# Altium PCB 多合一红外工具(1).PcbDoc
Units mm, origin at the board's own origin, x right, y up, seen from the top; angles counter-clockwise.
Board outline 166.97 x 106.58 mm, 2 copper layers (Top Layer, Bottom Layer); 62 components, 55 nets, 219 pads, 54 vias.
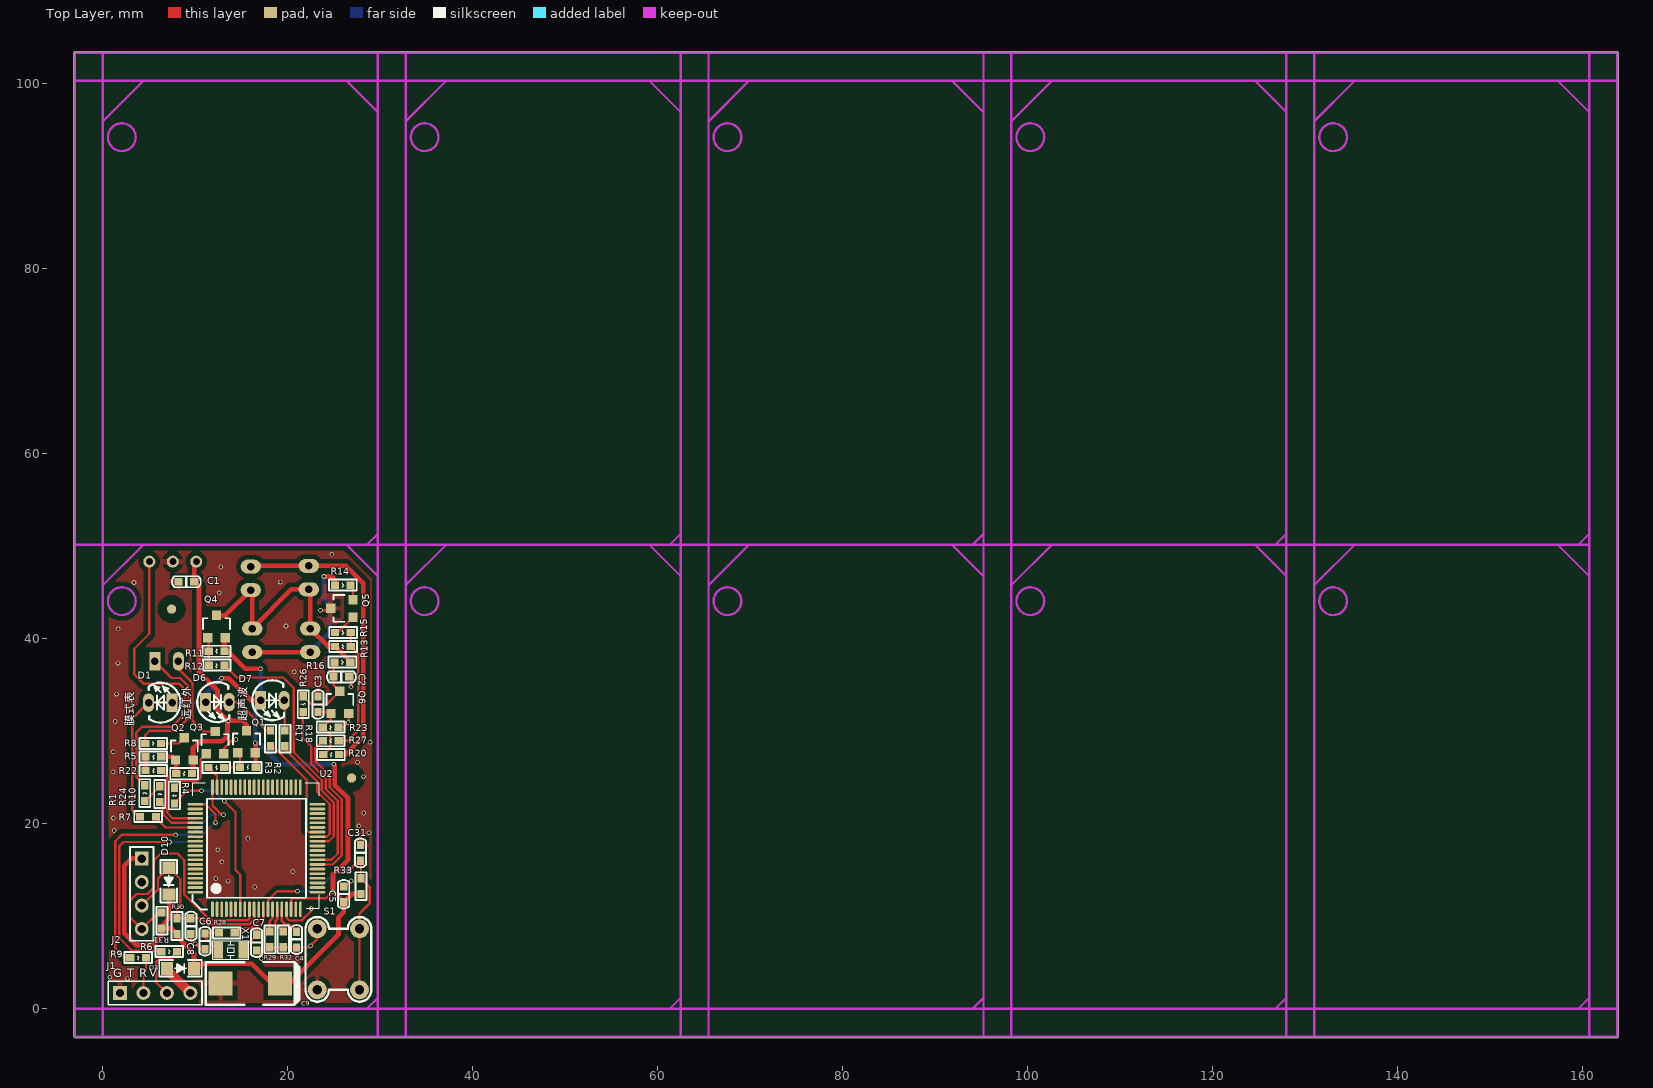
[diagram p0: Top Layer view]
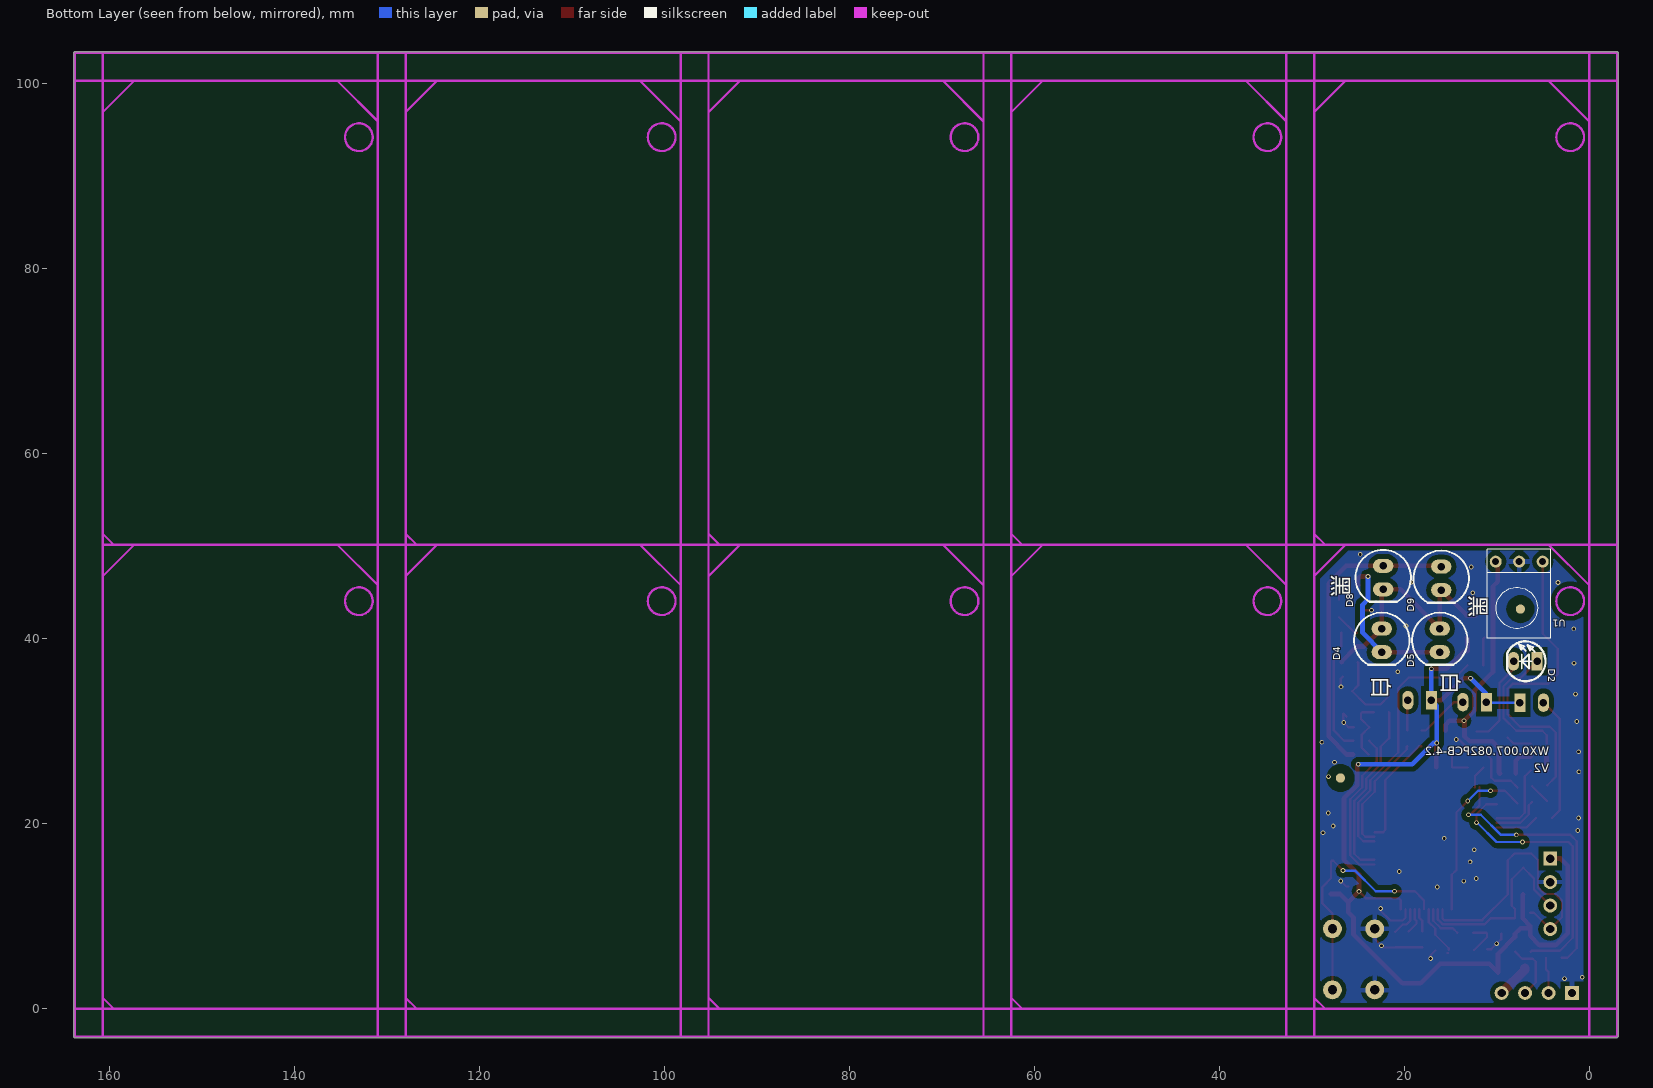
[diagram p1: Bottom Layer view, seen from below]

## Layer stack, top to bottom
Top Solder: solder mask 0.0102, Solder Resist, Dk 3.5
Top Layer: signal copper 0.0356
Dielectric 1: dielectric 0.32, FR-4, Dk 4.8
Bottom Layer: signal copper 0.0356
Bottom Solder: solder mask 0.0102, Solder Resist, Dk 3.5

## Board outline
-3.127,-2.972 ccw(c-3,-2.972) -3.09,-3.062 -3.062,-3.09 ccw(c-2.972,-3) -2.972,-3.127 163.717,-3.127 ccw(c163.717,-3) 163.844,-3 163.844,103.33 ccw(c163.717,103.33) 163.717,103.457 -2.997,103.457 ccw(c-2.997,103.33) -2.999,103.457 ccw(c-3,103.33) -3.127,103.33 -3.127,100.33 cw(c-3,100.33) -3.127,100.332 -3.127,100.33

## Design rules (kind name [scope] priority, off if disabled: settings)
Clearance VIA-VIA [ISVIA vs ISVIA] p1: gap=0.508 ignorepadtopadclearanceinfootprint=FALSE except(0: Arc-Hole Track-Hole SMDPad-Hole THPad-Hole Via-Hole Fill-Hole Poly-Hole Region-Hole Text-Hole)
Clearance VIA-PAD [ISVIA vs ISPAD] p2: gap=0.381 ignorepadtopadclearanceinfootprint=FALSE except(0: Arc-Hole Track-Hole SMDPad-Hole THPad-Hole Via-Hole Fill-Hole Poly-Hole Region-Hole Text-Hole)
Clearance VIA-TRACK [ISVIA vs ISTRACK] p3: gap=0.381 ignorepadtopadclearanceinfootprint=FALSE except(0: Arc-Hole Track-Hole SMDPad-Hole THPad-Hole Via-Hole Fill-Hole Poly-Hole Region-Hole Text-Hole)
Clearance Polygon [InPolygon] p4: gap=0.508 ignorepadtopadclearanceinfootprint=FALSE except(0: Arc-Hole Track-Hole SMDPad-Hole THPad-Hole Via-Hole Fill-Hole Poly-Hole Region-Hole Text-Hole)
Clearance [All] p5: gap=0.178 ignorepadtopadclearanceinfootprint=FALSE except(0: Arc-Hole Track-Hole SMDPad-Hole THPad-Hole Via-Hole Fill-Hole Poly-Hole Region-Hole Text-Hole)
ComponentClearance [All] p1 off: gap=0.254 collisioncheckmode=3 verticalgap=0.254 showdistances=FALSE
FabricationTestPointUsage TestPointUsage [All] p1: valid=0 allowmultiple=FALSE
FabricationTestpoint Testpoint [(IsPad And (OnTopLayer Or OnBottomLayer))] p1: side=3 testpointundercomponent=TRUE minsize=1.016 maxsize=2.54 preferedsize=1.524 minholesize=0 maxholesize=1.016 preferedholesize=0.813 testpointgrid=0.025 allowsidetop=TRUE allowsidebottom=TRUE usegrid=TRUE gridtolerance=0
HoleSize [All] p1 off: absolutevalues=TRUE maxlimit=7.62 minlimit=0 maxpercent=80.000 minpercent=20.000
HoleToHoleClearance [All] p1 off: gap=0.254 allowstackedmicrovias=TRUE
LayerPairs [All] p1 off: enforce=TRUE
MinimumSolderMaskSliver [All] p1 off: minsoldermaskwidth=0.254
NetAntennae [All] p1 off: netantennaetolerance=0
PlaneConnect [All] p1: planeconnectstyle=Relief reliefexpansion=0.508 reliefentries=4 reliefconductorwidth=0.508 reliefairgap=0.254
PolygonConnect [isvia] p1: connectstyle=Direct reliefconductorwidth=0.381 reliefentries=4 polygonreliefangle="90 Angle" airgapwidth=0.254
PolygonConnect PolygonConnect_1 [All] p2: connectstyle=Relief reliefconductorwidth=0.508 reliefentries=4 polygonreliefangle="90 Angle" airgapwidth=0.508
RoutingVias [All] p1: holewidth=0.254 width=0.508 viastyle="Through Hole" minholewidth=0.127 minwidth=0.127 maxholewidth=1.27 maxwidth=2.54
SilkToBoardRegionClearance [All] p1 off:
SilkToSilkClearance [All] p1 off: silktosilkclearance=0.254
SilkToSolderMaskClearance [IsPad] p1 off: minsilkscreentomaskgap=0.254 clearancetoexposedcopper=TRUE
SolderMaskExpansion [All] p1: expansion=0.102
Width [All] p1: maxlimit=7.62 minlimit=0.203 preferedwidth=0.203
18 further rules are at their usual default settings.

## Components (designator, comment, footprint, x,y, rotation, side; value= is the part's Value field where it differs from the comment)
C1 "100nF/50V" CAP0603 8.204,46.177 r0 top
C2 "10pF/50V" CAP0603 24.968,35.89 r0 top
C3 "10pF/50V" CAP0603 23.266,32.08 r90 top
C4 "100nF/50V" CAP0603 20.955,8.306 r270 top
C5 "100nF/50V" CAP0603 26.06,13.208 r270 top
C6 "12pF/50V" CAP0603 11.049,8.128 r270 top
C7 "12pF/50V" CAP0603 16.637,7.976 r270 top
C8 "0.1uF" C0603 9.525,8.103 r90 top
C9 "220uF/10V" CAT7343 19.152,2.743 r180 top
C31 "0.1uF" C0603 27.864,17.678 r270 top
D1 "LED" LED2_300 7.493,33.096 r270 top
D2 "AT203" IR_254_532_300 5.639,37.567 r270 bottom
D3 "DSK14" SOD-123FL 6.883,4.369 r0 top
D4 "AT205B" IR_254_1000_500 22.428,39.827 r90 bottom
D5 "AT205B" IR_254_1000_500 16.154,39.827 r90 bottom
D6 "LED" LED2_300 11.125,33.147 r90 top
D7 "LED" LED2_300 17.069,33.35 r90 top
D8 "AT405-PD-01" IR_254_1000_500 22.276,46.609 r90 bottom
D9 "AT405-PD-01" IR_254_1000_500 16.002,46.533 r90 bottom
D10 "LL4148" SOD-123FL 7.137,15.316 r270 top
J1 "Input" HDR1X4 1.854,1.702 r0 top
J2 "HDR254M1X4" HDR1X4 4.216,16.231 r270 top
Q1 "PNPS-9012" SOT-23 15.537,28.854 r0 top
Q2 "PNPS-9012" SOT-23 8.814,28.092 r0 top
Q3 "NPNS-9013" SOT-23 12.141,28.778 r0 top
Q4 "PNPS-9012" SOT-23 12.294,41.326 r0 top
Q5 "PNPS-9012" SOT-23 25.857,43.282 r90 top
Q6 "NPNS-9013" SOT-23 25.629,33.122 r0 top
R1 "51R 5%" RES0603 4.547,24.155 r270 top
R2 "10K 5%" RES0603 14.834,26.111 r0 top
R3 "1K 5%" RES0603 11.43,26.086 r0 top
R4 "10K 5%" RES0603 7.95,25.425 r0 top
R5 "1K 5%" RES0603 4.623,27.229 r0 top
R6 "1K 5%" RES0603 8.026,6.172 r180 top
R7 "1K" R0603 5.74,20.752 r180 top
R8 "220R 5%" RES0603 6.299,28.677 r180 top
R9 "1K 5%" RES0603 4.674,5.512 r180 top
R10 "1K 5%" RES0603 7.747,23.901 r270 top
R11 "10K 5%" RES0603 11.455,38.659 r0 top
R12 "1K 5%" RES0603 13.157,37.135 r180 top
R13 "20K 5%" RES0603 26.822,39.167 r180 top
R14 "100R 5%" RES0603 26.797,45.796 r180 top
R15 "3K 5%" RES0603 26.822,40.665 r180 top
R16 "20K 5%" RES0603 26.746,37.465 r180 top
R17 "1K" R0603 18.136,28.372 r90 top
R18 "1K" R0603 19.685,28.372 r90 top
R20 "20K 5%" RES0603 23.825,27.483 r0 top
R22 "0R 5%" RES0603 4.623,25.756 r0 top
R23 "47K 5%" RES0603 25.476,30.429 r180 top
R24 "0R 5%" RES0603 6.172,24.054 r270 top
R26 "0R 5%" RES0603 21.666,32.08 r90 top
R27 "0R 5%" RES0603 23.8,28.981 r0 top
R28 "100k" R0603 12.573,8.204 r0 top
R29 "100k" R0603 18.059,6.655 r90 top
R30 "10k" R0603 8.026,9.779 r270 top
R31 "1K" R0603 6.375,8.687 r90 top
R32 "100k" R0603 19.507,6.655 r90 top
R33 "200k" R0603 27.915,14.097 r270 top
S1 "KEY" KEY-6*6 25.476,5.334 r90 top
U1 "HMR538" HM538R1 5.029,48.336 r0 bottom locked
U2 "R7F0C004M2DFB" LQFP80 16.612,17.348 r90 top
X1 "32.768K" XTAL-2S 15.189,6.35 r180 top

## Footprints (in the part's own frame and the unit in brackets; to place one, negate y for a bottom-side part, rotate by r counter-clockwise, add the part's x,y. Pads: shape width x height; smd on the part's side, far side on the other; paste and mask are expansions set on the pad)
C0603 [mil]
  rect 35x31 smd: 1(-0.49,0) 2(66.51,0)
  silkscreen extent -29,-24 94,23, body extent 1,-15 72,15, height 20
CAP0603 [mil]
  rect 35x31 smd: 1(-0.49,0) 2(66.51,0)
  silkscreen extent -29,-24 94,23, body extent 1,-15 72,15, height 20
CAT7343 [mm]
  rect 2.6x2.6 smd: 1(0,0) 2(6.4,0)
  silkscreen extent -2.08,-2.3 8.03,2.33, body extent -0.6,-2.29 7,2.31, height 3.1
HDR1X4 [mm] "Connector; Header; 4 Position"
  rect 1.5x1.5 hole 0.9: 1(0,0)
  round 1.5 hole 0.9: 2(2.54,0) 3(5.08,0) 4(7.62,0)
  silkscreen extent -1.27,-1.27 8.89,1.27
HM538R1 [mm]
  round 1.3 hole 0.75: 1(0,0) 2(2.54,0) 3(5.08,0)
  silkscreen extent -0.89,-1.35 5.97,8.31
IR_254_532_300 [mm]
  rect 2x1.2 hole 0.813: 1(0,0)
  oval 2x1.2 hole 0.813: 2(0,-2.54)
  silkscreen extent -2.16,-3.23 2.16,0.91, body extent -1.65,-2.91 1.64,0.39, height 5.51
IR_254_1000_500 [mil]
  oval 60x86.61 hole 32: 1(50,0) 2(-50,0)
  silkscreen extent -103,-118 118,118
KEY-6*6 [mil]
  round 80 hole 40: 1(-130,-90) 1(130,-90) 2(-130,90) 2(130,90)
  silkscreen extent -180,-140 180,140
LED2_300 [mm]
  rect 2x1.2 hole 0.813: 1(0,0)
  oval 2x1.2 hole 0.813: 2(0,-2.54)
  silkscreen extent -2.16,-2.53 2.16,0.91, body extent -1.65,-2.91 1.64,0.39, height 5.51
LQFP80 [mm]
  oval 1.7x0.3 smd: 1(-6.6,4.75) 2(-6.6,4.25) 3(-6.6,3.75) 4(-6.6,3.25) 5(-6.6,2.75) 6(-6.6,2.25) 7(-6.6,1.75) 8(-6.6,1.25) 9(-6.6,0.75) 10(-6.6,0.25) 11(-6.6,-0.25) 12(-6.6,-0.75) 13(-6.6,-1.25) 14(-6.6,-1.75) 15(-6.6,-2.25) 16(-6.6,-2.75) 17(-6.6,-3.25) 18(-6.6,-3.75) 19(-6.6,-4.25) 20(-6.6,-4.75) 41(6.6,-4.75) 42(6.6,-4.25) 43(6.6,-3.75) 44(6.6,-3.25) 45(6.6,-2.75) 46(6.6,-2.25) 47(6.6,-1.75) 48(6.6,-1.25) 49(6.6,-0.75) 50(6.6,-0.25) 51(6.6,0.25) 52(6.6,0.75) 53(6.6,1.25) 54(6.6,1.75) 55(6.6,2.25) 56(6.6,2.75) 57(6.6,3.25) 58(6.6,3.75) 59(6.6,4.25) 60(6.6,4.75)
  oval 0.3x1.7 smd: 21(-4.75,-6.6) 22(-4.25,-6.6) 23(-3.75,-6.6) 24(-3.25,-6.6) 25(-2.75,-6.6) 26(-2.25,-6.6) 27(-1.75,-6.6) 28(-1.25,-6.6) 29(-0.75,-6.6) 30(-0.25,-6.6) 31(0.25,-6.6) 32(0.75,-6.6) 33(1.25,-6.6) 34(1.75,-6.6) 35(2.25,-6.6) 36(2.75,-6.6) 37(3.25,-6.6) 38(3.75,-6.6) 39(4.25,-6.6) 40(4.75,-6.6) 61(4.75,6.6) 62(4.25,6.6) 63(3.75,6.6) 64(3.25,6.6) 65(2.75,6.6) 66(2.25,6.6) 67(1.75,6.6) 68(1.25,6.6) 69(0.75,6.6) 70(0.25,6.6) 71(-0.25,6.6) 72(-0.75,6.6) 73(-1.25,6.6) 74(-1.75,6.6) 75(-2.25,6.6) 76(-2.75,6.6) 77(-3.25,6.6) 78(-3.75,6.6) 79(-4.25,6.6) 80(-4.75,6.6)
  silkscreen extent -6.62,-6.81 7.1,6.91, body extent -5.33,-5.33 5.36,5.33, height 2
R0603 [mil]
  rect 35x31 smd: 1(0,0) 2(67,0)
  silkscreen extent -26,-24 92,23, body extent 0,-15 71,15, height 12
RES0603 [mil]
  rect 35x31 smd: 1(0,0) 2(67,0)
  silkscreen extent -26,-24 92,23, body extent 0,-15 71,15, height 12
SOD-123FL [mm]
  rect 1.3x1.4 smd: 1(0.074,0) 2(2.974,0)
  silkscreen extent -0.78,-0.9 3.82,0.9, body extent -0.28,-0.82 3.32,0.82, height 0.95
SOT-23 [mil]
  rect 40x40 smd: 1(-37.4,-47.24) 2(37.4,-47.24) 3(0,47.24)
  silkscreen extent -57,-12 57,35, body extent -57,-55 57,55, height 47
XTAL-2S [mm]
  rect 1x1.8 smd: 1(0,0) 2(2.7,0)
  silkscreen extent -0.6,-1 3.3,1

## Part data
C1 C4 C5: library part 101020103-0021, "104pF,50 V,±10%,0603,国巨,CC0603KRX7R9BB104"
C2 C3: library part 101020103-0014, "10pF,50 V,±5%,0603,X7R,国巨,CC0603JRNPO9BN100"
C6 C7: library part 101020103-0005, "12P,50 V,±5%,0603,国巨,CC0603JRNPO9BN12"
C8 C31: library part CAP, "无极性电容"
C9: library part 1010205-0001, "220uF,10 V,±10%,7343,AVX/ KEMET,T491D227K010AT"
D1 D6 D7: library part 101040102-0001, "圆形插件,3mm 圆形,插件,红光,湖北匡通电子有限公司,3BB4HC"
D2: library part 101040102-0010, "DIP-2,φ3,插件,红光,上海品观电子有限公司/可得,AT203"
D3: library part 101040101-0043, "DSK14,SOD-123FL,1 A,40 V,28 V,台湾强茂集团苏州群鑫电子,DSK14"
D4 D5: library part 101040101-0034, "直插,Φ5.8mm圆头透明色，,0.1 A,4 V,5 V,上海品观电子有限公司,AT205B"
D8 D9: library part 101040101-0035, "Φ5.8mm圆头黑色，光电接收管,Φ5.8mm,0.01 A,1.2 V,60 V,上海品观电子,AT405-PD-01"
D10: library part 101040101-0005, "4148,4148,0.2 A,1 V,100 V,先科,LL4148"
J1: library part "Header 4", "Header, 4-Pin"
Q1 Q2 Q4 Q5: library part 101040201-0001, "9012,PNP,SOT-23,JCET;长电,S9012"
Q3 Q6: library part 101040201-0002, "9013,NPN,SOT-23,长电,S9013"
R1: library part 101010103-0037, "国巨,±5%,0603,,155 ℃,-55 ℃,RC0603JR-0751RL,无铅,100 ppm/℃,1/10W,,51欧"
R2 R4 R11: library part 101010103-0003, "国巨,±5%,0603,,155 ℃,-55 ℃,RC0603JR-0710KL,无铅,200 ppm/℃,1/10W,,10K"
R3 R5 R6 R9 R10 R12: library part 101010103-0008, "1K,±5%,1/10W,0603,国巨,RC0603JR-071KL"
R7 R17 R18 R28 R29 R30 R31 R32 R33: library part RES
R8: library part 101010103-0019, "220±5%,1/10W,0603,国巨,RC0603JR-07220RL"
R13 R16 R20: library part 101010103-0004, "国巨,±5%,0603,,155 ℃,-55 ℃,RC0603JR-0720KL,无铅,200 ppm/℃,1/10W,,20K"
R14: library part 101010103-0022, "100R,±5%,1/10W,0603,国巨,RC0603JR-07100RL"
R15: library part 101010103-0006, "国巨,±5%,0603,,155 ℃,-55 ℃,RC0603JR-073KL,无铅,100 ppm/℃,1/10W,,3K"
R22 R24 R26 R27: library part 101010103-0001, "国巨,±5%,0603,,155 ℃,-55 ℃,RC0603J2-070RL,无铅,200 ppm/℃,1/10W,,0R"
R23: library part 101010103-0012, "47K,±5%,1/10W,0603,国巨,RC0603JR-0747KL"
S1: library part SW-PB, "Switch"
U2: library part 1010502-0046, "LQFP80,贴片,瑞萨,R7F0C004M2DFB"
X1: library part XTAL1, "晶振,2PIN"

## Free pads (board coordinates)
  round 1 smd: 0(7.442,43.205) 0(26.899,24.943)
  round 1 smd far side: 1(7.442,43.205) 1(26.899,24.943)

## Via types
v1: diameter 0.508, hole 0.305, Top Layer to Bottom Layer, tented both sides, 54 vias

## Nets (pads, with @x,y where several pads share a name; then routed paths per layer and width w, separated by ;. In a path a pad name is that pad's centre, name@x,y a point inside that pad or via, vN(x,y) a via of type N, cw(c..) or ccw(c..) an arc to the next point about the centre after c; other vN are vias at no path point)
3.3V: C5.2 C9.1 D1.1 D3.2 D6.1 D7.1 D10.2 J2.1 Q1.2 Q4.2 R2.2 R11.2 R30.2 R31.1 R33.2 U2.18 | length 112.5
  Top Layer w0.254: U2.18 20.362,11.726 20.574,11.938 24.143,11.938 v1(24.892,12.687)
  Top Layer w0.508: J2.1 3.099,16.231 2.337,15.469 2.337,8.179 3.632,6.883 5.385,6.883 6.375,7.874 R31.1 ; D10.2 7.201,12.342 7.201,9.765 6.375,8.94 R31.1 ; v1(12.827,35.738) 13.614,35.738 16.002,33.35 D7.1 ; Q4.2 13.157,40.039 R11.2 13.487,38.659 15.392,36.754 v1(17.069,36.754) ; v1(16.485,28.727) 16.535,28.677 R2.2 ; v1(24.968,26.441) 25.095,26.314 25.095,24.18 26.518,22.758 26.518,16.129 24.892,14.503 v1(24.892,12.687) C5.2 ; R33.2 26.937,12.395 C5.2 ; R31.1 7.417,8.687 R30.2 8.026,7.76 9.857,5.929 9.857,3.912 10.797,4.851 16.129,4.851 18.237,2.743 C9.1 20.218,2.743 25.476,8.001 25.476,9.855 26.06,10.439 C5.2
  Bottom Layer w0.254: D1.1 D6.1@11.074,33.096
  Bottom Layer w0.508: D6.1 11.125,34.036 v1(12.827,35.738) ; v1(17.069,36.754) D7.1 16.485,32.766 v1(16.485,28.727) 16.84,28.727 19.126,26.441 v1(24.968,26.441)
DB_RXD: R6.2 U2.61 | length 30.1
  Top Layer w0.254: R6.2 6.223,6.274 3.175,6.274 1.778,7.671 1.778,17.551 2.248,18.021 v1(7.212,18.021) ; U2.61 11.125,22.098 12.192,21.031 v1(12.192,20.117)
  Bottom Layer w0.254: v1(7.212,18.021) 10.02,18.021 12.116,20.117 v1(12.192,20.117)
DB_TXD: R9.2 U2.60 | length 30.1
  Top Layer w0.254: R9.2 2.362,5.512 1.346,6.528 1.346,18.11 2.032,18.796 v1(7.874,18.796) ; U2.60 11.862,21.972 12.878,20.956 12.902,20.98 v1(13.056,20.98)
  Bottom Layer w0.254: v1(7.874,18.796) 9.55,18.796 11.735,20.98 v1(13.056,20.98)
GND: C1.1 C2.2 C3.2 C4.2 C5.1 C6.2 C7.2 C8.1 C9.2 C31.1 J1.1 J2.2 Q3.2 Q5.3 Q6.2 R23.1 R29.1 R32.1 S1.2 U1.2 U2.17 | length 23
  Top Layer w0.254: C8.1 9.525,7.518 v1(10.008,7.036) 10.605,6.439 C6.2 ; Q3.2 13.091,28.128 14.072,29.108 v1(14.376,29.108) ; C7.2 17.145,5.778 v1(17.145,5.436) ; R29.1 R32.1 C4.2@20.917,6.655 ; U2.17 19.862,9.831 20.155,9.538 21.501,9.538 22.555,10.592 v1(22.555,10.846) ; C4.2 22.263,6.616 v1(22.454,6.807) 23.19,7.544 S1.2@23.19,8.636 ; v1(23.546,43.078) 24.454,43.078 Q5.3 ; R23.1 26.035,30.429 v1(26.543,30.937) 26.579,30.973 Q6.2 Q6.2@26.238,31.581 ; C5.1 26.276,13.22 v1(26.873,13.818) ; C2.2 26.848,35.7 v1(26.848,34.798)
  other v1: 2.667,3.251 0.762,3.404 16.434,13.157 13.564,13.792 12.217,14.072 20.549,14.834 12.878,15.875 12.421,17.196 15.672,18.415 28.778,19.025 1.245,19.279 27.686,19.761 1.143,20.625 28.219,21.158 28.194,25.095 1.118,25.629 27.534,26.645 1.143,27.788 28.905,28.804 1.346,31.064 1.473,34.011 20.701,36.424 1.651,37.363 1.676,41.072 19.812,41.377 12.598,44.983 3.378,46.076 19.202,46.126 12.751,47.752 24.765,49.124
INTP3: U2.31
IR_IRR: R3.1 U2.59 | length 2.5
  Top Layer w0.254: R3.1 12.344,25.171 12.344,23.965 U2.59
IR_RXD: R1.2 R24.1 | length 2.3
  Top Layer w0.254: R1.2 4.572,22.454 R24.1
IR_TXD: R5.1 R22.1 | length 1.5
  Top Layer w0.508: R22.1 R5.1
IRDA_POW: D4.1 D5.1 D8.2 D9.2 Q4.3 R13.2 R16.1 | length 27.1
  Top Layer w0.508: Q4.3 13.265,42.526 D9.2 16.154,45.11 D5.1 20.396,45.339 D8.2 22.428,45.187 D4.1 24.359,39.167 R13.2 26.746,37.541 R16.1
KEY_INTP0: C31.2 R33.1 S1.1 U2.13 | length 27.6
  Top Layer w0.254: U2.13 17.862,11.715 18.847,12.7 v1(21.057,12.7) ; v1(26.619,14.935) 27.673,15.989 C31.2 27.915,15.938 R33.1 28.854,13.157 28.854,11.379 27.762,10.287 27.762,8.636 S1.1@27.762,2.032
  Bottom Layer w0.254: v1(21.057,12.7) 23.089,12.7 25.324,14.935 v1(26.619,14.935)
LED_IR: R7.1 U2.66 | length 4.7
  Top Layer w0.254: R7.1@5.74,20.625 6.767,19.598 U2.66
LED_LIR1: R18.1 U2.33 | length 12.9
  Top Layer w0.254: R18.1 19.71,28.346 19.71,28.054 19.718,28.054 23.19,24.582 23.19,23.463 24.536,22.117 24.536,18.923 24.212,18.598 U2.33
LED_LIR2: R17.1 U2.34 | length 12.1
  Top Layer w0.254: R17.1 18.416,28.372 22.057,24.731 22.057,19.32 22.278,19.098 U2.34
LIR_IRR: R12.1 U2.32 | length 28.3
  Top Layer w0.254: R12.1 14.478,35.814 19.507,35.814 20.65,34.671 20.65,27.733 23.673,24.71 23.673,23.591 24.968,22.295 24.968,18.644 24.423,18.098 U2.32
NetC3_1: C3.1 Q6.1 R20.1 R23.2 | length 7
  Top Layer w0.254: C3.1 24.532,32.068 Q6.1 24.679,31.333 R23.2 24.613,29.591 24.613,28.245 23.851,27.483 R20.1
NetC4_1: C4.1 U2.16 | length 3.3
  Top Layer w0.254: U2.16 19.362,9.493 19.748,9.106 20.167,9.106 C4.1
NetC6_1: C6.1 R28.1 X1.2 | length 4
  Top Layer w0.254: X1.2 12.421,6.35 11.049,7.722 C6.1 11.113,8.204 R28.1
NetD1_2: D1.2 R7.2 | length 13.6
  Top Layer w0.254: R7.2@4.039,20.625 3.175,21.488 3.175,31.318 D1.2
NetD2_1: D2.1 R8.2 | length 14.5
  Top Layer w0.254: R8.2 4.597,29.566 5.08,30.048 7.899,30.048 9.271,31.42 9.271,34.874 8.382,35.763 7.442,35.763 D2.1
NetD2_2: D2.2 Q3.3 | length 10
  Top Layer w0.254: D2.2 8.179,36.728 9.703,35.204 9.703,31.166 10.89,29.978 Q3.3
NetD4_2: D4.2 D5.2 R14.2 | length 17.7
  Top Layer w0.254: R14.2@24.841,45.796 R14.2
  Top Layer w0.508: D5.2 D4.2 ; v1(23.927,46.736) 24.765,46.736 25.095,46.406 R14.2
  Bottom Layer w0.508: D4.2 24.511,40.64 24.511,43.663 23.927,44.247 v1(23.927,46.736)
NetD6_2: D6.2 R17.2 | length 5.7
  Top Layer w0.254: D6.2 14.605,33.147 17.678,30.074 R17.2
NetD7_2: D7.2 R18.2 | length 3.4
  Top Layer w0.254: D7.2 D7.2@19.685,33.274 ; R18.2 D7.2@19.685,33.274 ; D7.2@19.736,33.223 D7.2@19.685,33.274
NetD8_1: D8.1 D9.1 R20.2 | length 33
  Top Layer w0.508: D9.1 16.078,47.879 D8.1 26.289,47.879 28.169,45.999 28.169,29.439 26.213,27.483 R20.2
NetJ1_2: J1.2 R9.1 | length 3.9
  Top Layer w0.254: J1.2 4.394,3.962 4.674,4.242 R9.1
NetJ1_3: J1.3 R6.1 | length 6.6
  Top Layer w0.254: J1.3 5.766,2.87 5.766,5.08 6.096,5.41 7.264,5.41 R6.1
NetQ1_1: Q1.1 R2.1 R3.2 | length 3.4
  Top Layer w0.254: R3.2 14.808,26.086 R2.1 14.834,27.407 Q1.1
NetQ2_1: Q2.1 R4.1 R5.2 | length 3.1
  Top Layer w0.508: R5.2 7.527,27.229 Q2.1 ; R4.1 Q2.1@7.95,26.806
NetQ2_3: Q2.3 R8.1 | length 2.8
  Top Layer w0.254: R8.1 8.198,28.677 Q2.3
NetQ3_1: Q3.1 R10.1 | length 6.1
  Top Layer w0.254: R10.1 8.484,24.638 10.236,24.638 10.577,24.978 10.577,26.964 Q3.1
NetQ4_1: Q4.1 R11.1 R12.2 | length 3
  Top Layer w0.254: Q4.1 11.455,40.014 R11.1 R12.2
NetQ5_1: Q5.1 R15.2 | length 2.6
  Top Layer w0.254: R15.2 25.391,40.665 Q5.1
NetQ5_2: Q5.2 R14.1 | length 1.7
  Top Layer w0.254: R14.1 27.057,45.536 Q5.2
NetR1_1: R1.1 U1.1 | length 33.8
  Top Layer w0.254: R1.1 3.607,25.095 3.607,29.845 4.242,30.48 7.468,30.48 8.839,31.852 8.839,34.569 8.255,35.154 4.394,35.154 3.404,36.144 3.404,38.913 5.029,40.538 U1.1
NetR22_2: R22.2 U2.64 | length 8.1
  Top Layer w0.254: R22.2 6.96,25.121 6.96,21.184 7.545,20.598 U2.64
NetR24_2: R24.2 U2.65 | length 5.4
  Top Layer w0.254: R24.2 6.528,21.996 6.528,21.005 7.434,20.098 U2.65
NetR26_1: R26.1 U2.28 | length 19.4
  Top Layer w0.254: R26.1 21.615,32.029 21.615,29.261 22.555,28.321 22.555,26.438 24.105,24.889 24.105,23.77 24.111,23.763 25.4,22.474 25.4,16.764 24.734,16.098 U2.28
NetR27_1: R27.1 U2.27 | length 17
  Top Layer w0.254: U2.27 24.869,15.598 25.832,16.561 25.832,22.653 24.536,23.949 24.536,25.197 22.987,26.746 22.987,28.169 R27.1
PSAM_CLK: U2.44
PSAM_RST: U2.67
PSAM_SDA: U2.45
RESET_N: U2.80
RST: C8.2 D10.1 J2.3 R30.1 U2.10 | length 21.4
  Top Layer w0.254: J2.3 5.969,12.903 5.969,14.074 D10.1 8.382,13.998 8.382,11.125 8.026,10.77 R30.1 8.039,9.792 9.5,9.792 10.63,9.792 11.278,9.144 15.876,9.144 16.362,9.63 U2.10
RXD1: U2.6
RXD3: C2.1 Q6.3 R16.2 R26.2 | length 8.4
  Top Layer w0.254: R26.2 22.555,32.893 24.2,32.893 Q6.3 24.956,34.994 C2.1 24.956,37.376 R16.2
TOOL0: J2.4 R31.2 U2.9 | length 29.5
  Top Layer w0.254: R31.2 5.994,10.389 J2.4 2.946,9.881 2.946,11.684 3.658,12.395 4.826,12.395 5.537,13.106 5.537,16.053 6.274,16.789 8.077,16.789 8.814,16.053 8.814,12.344 11.582,9.576 15.697,9.576 15.862,9.74 U2.9
TXD1: R10.2 U2.7 | length 18.8
  Top Layer w0.254: R10.2 9.119,23.571 v1(10.668,23.571) ; v1(13.132,22.454) 14.351,21.234 14.351,14.986 14.862,14.475 U2.7
  Bottom Layer w0.254: v1(10.668,23.571) 12.014,23.571 v1(13.132,22.454)
TXD3: R13.1 R15.1 R27.2 | length 13.5
  Top Layer w0.254: R27.2 26.518,28.981 27.61,30.074 27.61,38.379 R13.1 R15.1
VCC: C1.2 Q1.3 Q2.2 R4.2 U1.3 | length 30.4
  Top Layer w0.508: R4.2 9.764,25.537 Q2.2 9.764,28.179 10.49,28.905 12.929,28.905 13.487,29.464 13.487,31.09 v1(13.538,31.14) ; U1.3 9.894,48.121 C1.2 10.404,45.667 10.404,36.408 12.395,34.417 12.395,32.283 v1(13.538,31.14) ; Q1.3 15.537,30.717 15.113,31.14 v1(13.538,31.14)
VDD_BLE_CTL: U2.21
VIN: D3.1 J1.4 | length 3.7
  Top Layer w1.016: D3.1 6.957,4.219 J1.4
X1: R32.2 U2.15 | length 2.8
  Top Layer w0.254: U2.15 18.862,9.691 18.669,9.499 18.669,9.195 R32.2
X2: R29.2 U2.14 | length 2.5
  Top Layer w0.254: R29.2 18.059,9.5 18.362,9.802 U2.14
XT1: C7.1 U2.12 X1.1 | length 5.4
  Top Layer w0.254: X1.1 15.189,6.54 C7.1 16.637,8.661 17.362,9.386 U2.12 ; X1.1@15.238,6.02 X1.1@15.38,6.02
XT2: R28.2 U2.11 | length 4.4
  Top Layer w0.254: R28.2 14.783,8.712 16.055,8.712 16.862,9.519 U2.11
pads on no net: U2.1 U2.2 U2.3 U2.4 U2.5 U2.8 U2.19 U2.20 U2.22 U2.23 U2.24 U2.25 U2.26 U2.29 U2.30 U2.35 U2.36 U2.37 U2.38 U2.39 U2.40 U2.41 U2.42 U2.43 U2.46 U2.47 U2.48 U2.49 U2.50 U2.51 U2.52 U2.53 U2.54 U2.55 U2.56 U2.57 U2.58 U2.62 U2.63 U2.68 U2.69 U2.70 U2.71 U2.72 U2.73 U2.74 U2.75 U2.76 U2.77 U2.78 U2.79

## Polygon pours and split planes (outlines as drawn)
GND on Bottom Layer "Top Layer-No Net" (solid, remove dead copper, pour order 5): 0,0.025 28.524,0.025 29.794,1.295 29.794,46.711 26.34,50.165 4.386,50.165 0,45.779
GND on Top Layer "Top Layer-No Net" (solid, remove dead copper, pour order 4): 0,0.025 28.524,0.025 29.794,1.295 29.794,46.711 26.34,50.165 4.386,50.165 0,45.779

## Keep-outs
Keep-Out Layer:
  circle w0.254: c2.057,94.234 r1.5
  circle w0.254: c34.801,94.234 r1.5
  circle w0.254: c67.544,94.234 r1.5
  circle w0.254: c100.288,94.234 r1.5
  circle w0.254: c133.031,94.234 r1.5
  circle w0.254: c133.031,44.069 r1.5
  circle w0.254: c100.288,44.069 r1.5
  circle w0.254: c67.544,44.069 r1.5
  circle w0.254: c34.801,44.069 r1.5
  circle w0.254: c2.057,44.069 r1.5
  lines w0.254: -3,50.165 0,50.165 ; -3,103.33 -3,100.33 ; -2.997,103.33 0,103.33 ; 0,47.165 0,50.165 ; 25.121,50.165 29.743,50.165 ; 26.34,100.33 29.743,96.926 ; 29.743,-3 29.743,0 ; 29.743,45.542 29.743,50.165 ; 29.743,103.33 29.743,100.33 ; 32.743,-3 32.743,0 ; 32.743,47.165 32.743,50.165 ; 32.743,103.33 32.743,100.33 ; 59.083,50.165 62.487,46.761 ; 59.083,100.33 62.487,96.926 ; 62.487,-3 62.487,0 ; 62.487,103.33 62.487,100.33 ; 65.487,-3 65.487,0 ; 65.487,47.165 65.487,50.165 ; 65.487,103.33 65.487,100.33 ; 91.827,50.165 95.23,46.761 ; 91.827,100.33 95.23,96.926 ; 95.23,-3 95.23,0 ; 95.23,103.33 95.23,100.33 ; 98.23,-3 98.23,0 ; 98.23,47.165 98.23,50.165 ; 98.23,100.305 98.23,103.305 ; 124.57,50.165 127.974,46.761 ; 124.57,100.33 127.974,96.926 ; 127.974,-3 127.974,0 ; 127.974,103.33 127.974,100.33 ; 130.974,-3 130.974,0 ; 130.974,47.165 130.974,50.165 ; 130.974,103.33 130.974,100.33 ; 157.313,50.165 160.717,46.761 ; 157.313,100.33 160.717,96.926 ; 160.717,-3 160.717,0 ; 163.703,0 160.717,0 ; 163.717,100.355 163.717,-1.916 163.717,-3 0,-3 ; -3,0 -3,100.33 ; -3,0 -3,-2.972 -2.972,-3 0,-3 ; -3,0 0,0 ; -3,100.33 0,100.33 ; 0,-3 0,0 ; 0,0 28.55,0 ; 0,0 0,45.779 ; 0,45.779 4.386,50.165 ; 0,45.779 0,50.165 ; 0,50.165 0,95.944 ; 0,50.165 28.55,50.165 ; 0,50.165 4.386,50.165 ; 0,50.165 27.407,50.165 29.743,50.165 ; 0,95.944 0,100.33 ; 0,95.944 4.386,100.33 ; 0,100.33 160.717,100.33 ; 0,100.33 0,103.33 ; 0,100.33 27.407,100.33 29.743,100.33 ; 0,100.33 4.386,100.33 ; 0,103.33 160.717,103.33 ; 4.386,50.165 26.34,50.165 29.743,46.761 29.743,17.958 29.743,14.097 29.743,1.194 ; 4.386,100.33 25.121,100.33 29.743,100.33 ; 28.55,0 29.743,0 ; 28.55,0 29.743,1.194 ; 28.55,50.165 29.743,51.359 ; 28.55,50.165 29.743,50.165 ; 29.743,0 32.743,0 ; 29.743,0 29.743,1.194 ; 29.743,50.165 29.743,51.359 ; 29.743,50.165 32.743,50.165 ; 29.743,51.359 29.743,64.262 29.743,68.123 29.743,95.707 29.743,100.33 ; 32.743,0 32.743,45.779 ; 32.743,0 61.293,0 ; 32.743,45.779 32.743,50.165 ; 32.743,45.779 37.129,50.165 ; 32.743,50.165 61.293,50.165 ; 32.743,50.165 32.743,95.944 ; 32.743,50.165 60.15,50.165 62.487,50.165 ; 32.743,50.165 37.129,50.165 ; 32.743,95.944 37.129,100.33 ; 32.743,95.944 32.743,100.33 ; 32.743,100.33 37.129,100.33 ; 32.743,100.33 60.15,100.33 62.487,100.33 ; 37.129,50.165 57.864,50.165 62.487,50.165 ; 37.129,100.33 57.864,100.33 62.487,100.33 ; 61.293,0 62.487,1.194 ; 61.293,0 62.487,0 ; 61.293,50.165 62.487,50.165 ; 61.293,50.165 62.487,51.359 ; 62.487,0 65.487,0 ; 62.487,0 62.487,1.194 ; 62.487,1.194 62.487,14.097 62.487,17.958 62.487,45.542 62.487,50.165 ; 62.487,50.165 62.487,51.359 ; 62.487,50.165 65.487,50.165 ; 62.487,51.359 62.487,64.262 62.487,68.123 62.487,95.707 62.487,100.33 ; 65.487,0 65.487,45.779 ; 65.487,0 94.036,0 ; 65.487,45.779 65.487,50.165 ; 65.487,45.779 69.873,50.165 ; 65.487,50.165 94.036,50.165 ; 65.487,50.165 65.487,95.944 ; 65.487,50.165 92.893,50.165 95.23,50.165 ; 65.487,50.165 69.873,50.165 ; 65.487,95.944 69.873,100.33 ; 65.487,95.944 65.487,100.33 ; 65.487,100.33 69.873,100.33 ; 65.487,100.33 92.893,100.33 95.23,100.33 ; 69.873,50.165 90.607,50.165 95.23,50.165 ; 69.873,100.33 90.607,100.33 95.23,100.33 ; 94.036,0 95.23,1.194 ; 94.036,0 95.23,0 ; 94.036,50.165 95.23,50.165 ; 94.036,50.165 95.23,51.359 ; 95.23,0 98.23,0 ; 95.23,0 95.23,1.194 ; 95.23,1.194 95.23,14.097 95.23,17.958 95.23,45.542 95.23,50.165 ; 95.23,50.165 95.23,51.359 ; 95.23,50.165 98.23,50.165 ; 95.23,51.359 95.23,64.262 95.23,68.123 95.23,95.707 95.23,100.33 ; 98.23,0 98.23,45.779 ; 98.23,0 126.78,0 ; 98.23,45.779 98.23,50.165 ; 98.23,45.779 102.616,50.165 ; 98.23,50.165 126.78,50.165 ; 98.23,50.165 98.23,95.944 ; 98.23,50.165 125.637,50.165 127.974,50.165 ; 98.23,50.165 102.616,50.165 ; 98.23,95.944 102.616,100.33 ; 98.23,95.944 98.23,100.33 ; 98.23,100.33 102.616,100.33 ; 98.23,100.33 125.637,100.33 127.974,100.33 ; 102.616,50.165 123.351,50.165 127.974,50.165 ; 102.616,100.33 123.351,100.33 127.974,100.33 ; 126.78,0 127.974,1.194 ; 126.78,0 127.974,0 ; 126.78,50.165 127.974,50.165 ; 126.78,50.165 127.974,51.359 ; 127.974,0 130.974,0 ; 127.974,0 127.974,1.194 ; 127.974,1.194 127.974,14.097 127.974,17.958 127.974,45.542 127.974,50.165 ; 127.974,50.165 127.974,51.359 ; 127.974,50.165 130.974,50.165 ; 127.974,51.359 127.974,64.262 127.974,68.123 127.974,95.707 127.974,100.33 ; 130.974,0 130.974,45.779 ; 130.974,0 159.523,0 ; 130.974,45.779 130.974,50.165 ; 130.974,45.779 135.36,50.165 ; 130.974,50.165 159.523,50.165 ; 130.974,50.165 130.974,95.944 ; 130.974,50.165 158.38,50.165 160.717,50.165 ; 130.974,50.165 135.36,50.165 ; 130.974,95.944 135.36,100.33 ; 130.974,95.944 130.974,100.33 ; 130.974,100.33 135.36,100.33 ; 130.974,100.33 158.38,100.33 160.717,100.33 ; 135.36,50.165 156.094,50.165 160.717,50.165 ; 135.36,100.33 156.094,100.33 160.717,100.33 ; 159.523,0 160.717,1.194 ; 159.523,0 160.717,0 ; 159.523,50.165 160.717,50.165 ; 159.523,50.165 160.717,51.359 ; 160.717,0 160.717,1.194 ; 160.717,1.194 160.717,14.097 160.717,17.958 160.717,45.542 160.717,50.165 ; 160.717,50.165 160.717,51.359 ; 160.717,51.359 160.717,64.262 160.717,68.123 160.717,95.707 160.717,100.33 ; 160.717,100.33 163.717,100.33 163.717,103.271 163.717,103.33 160.717,103.33 ; 160.717,100.33 160.717,103.33

## Other copper
Top Layer:
  pour cut-out: 5.942,43.205 ccw(c7.442,43.205) 7.442,41.705 ccw(c7.442,43.205) 8.942,43.205 ccw(c7.442,43.205) 7.442,44.705 ccw(c7.442,43.205)
  pour cut-out: 25.399,24.943 ccw(c26.899,24.943) 26.899,23.443 ccw(c26.899,24.943) 28.399,24.943 ccw(c26.899,24.943) 26.899,26.443 ccw(c26.899,24.943)
Bottom Layer:
  pour cut-out: 5.942,43.205 ccw(c7.442,43.205) 7.442,41.705 ccw(c7.442,43.205) 8.942,43.205 ccw(c7.442,43.205) 7.442,44.705 ccw(c7.442,43.205)
  pour cut-out: 25.399,24.943 ccw(c26.899,24.943) 26.899,23.443 ccw(c26.899,24.943) 28.399,24.943 ccw(c26.899,24.943) 26.899,26.443 ccw(c26.899,24.943)

## Silkscreen, mask and mechanical layers (free items; w line width, h text height)
Top Overlay:
  text "远红外" at 9.855,31.191 h1.52 r90
  text "超声波" at 15.9,31.09 h1.52 r90
  text "膜式表" at 3.683,30.556 h1.52 r90
  text "V" at 5.029,3.124 h1.52
  text "G" at 1.118,3.099 h1.52
  text "T" at 2.642,3.099 h1.52
  text "R" at 3.937,3.099 h1.52
Bottom Overlay:
  text "黑" at 28.346,46.939 h3.05 r90
  text "黑" at 13.462,44.679 h3.05 r90
  text "白" at 16.408,36.424 h3.05 r90
  text "白" at 23.952,35.941 h3.05 r90
  text "WX0.007.082PCB-4.2" at 4.343,27.076 h1.52
  text "V2" at 4.318,25.248 h1.52